# Altium PCB PCB1.PcbDoc
Units mil, origin at the board's own origin, x right, y up, seen from the top; angles counter-clockwise.
Board outline 1650 x 1605 mil, 2 copper layers (Top Layer, Bottom Layer); 17 components, 8 nets, 50 pads, 67 vias.
Unrouted connection lines stored in the file: 1.
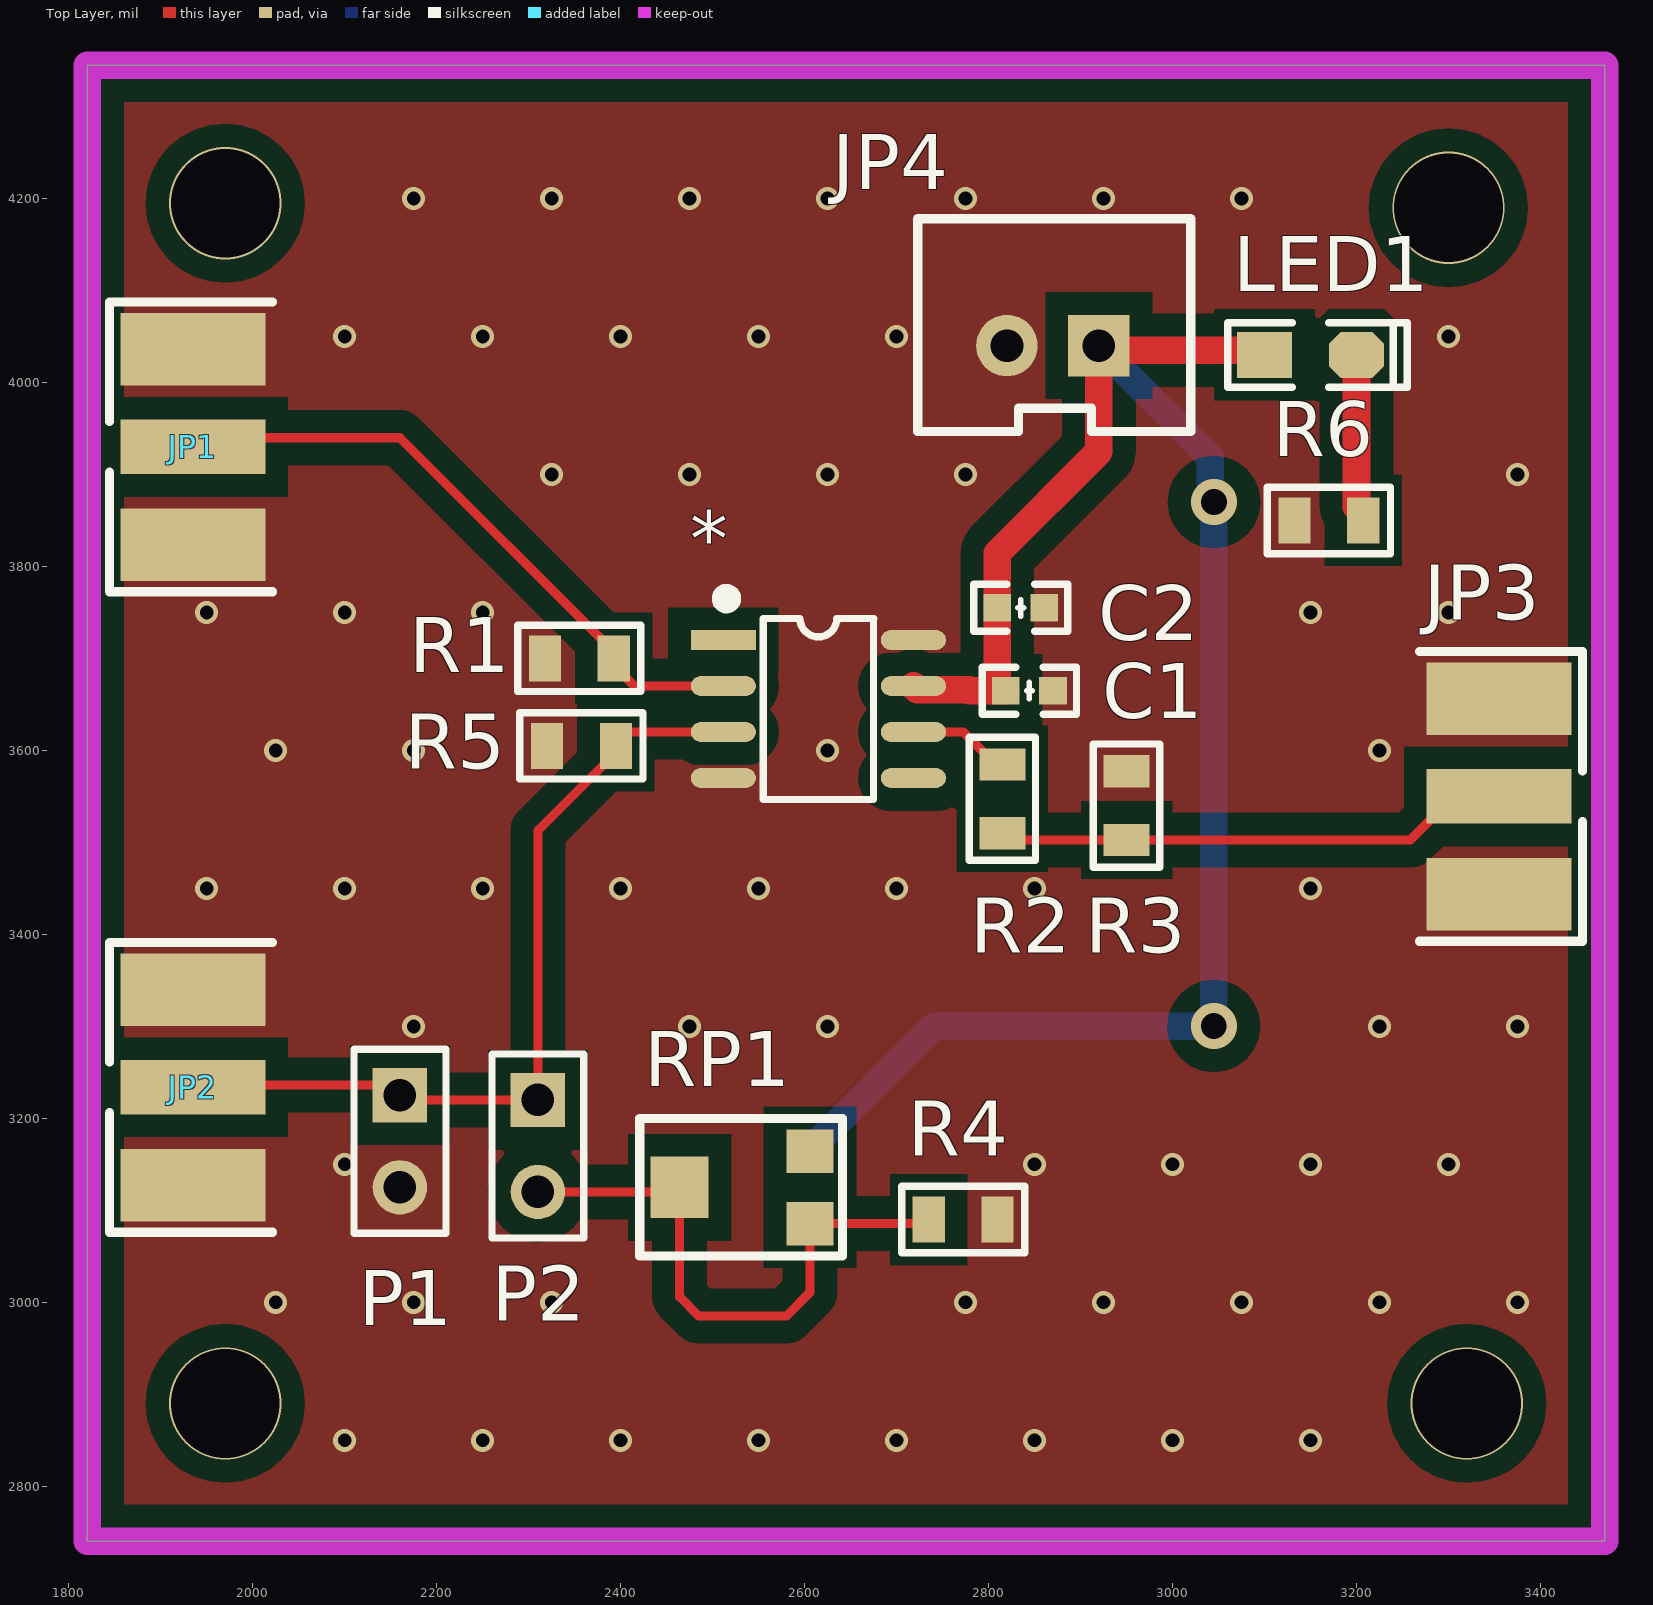
[diagram p0: Top Layer view]
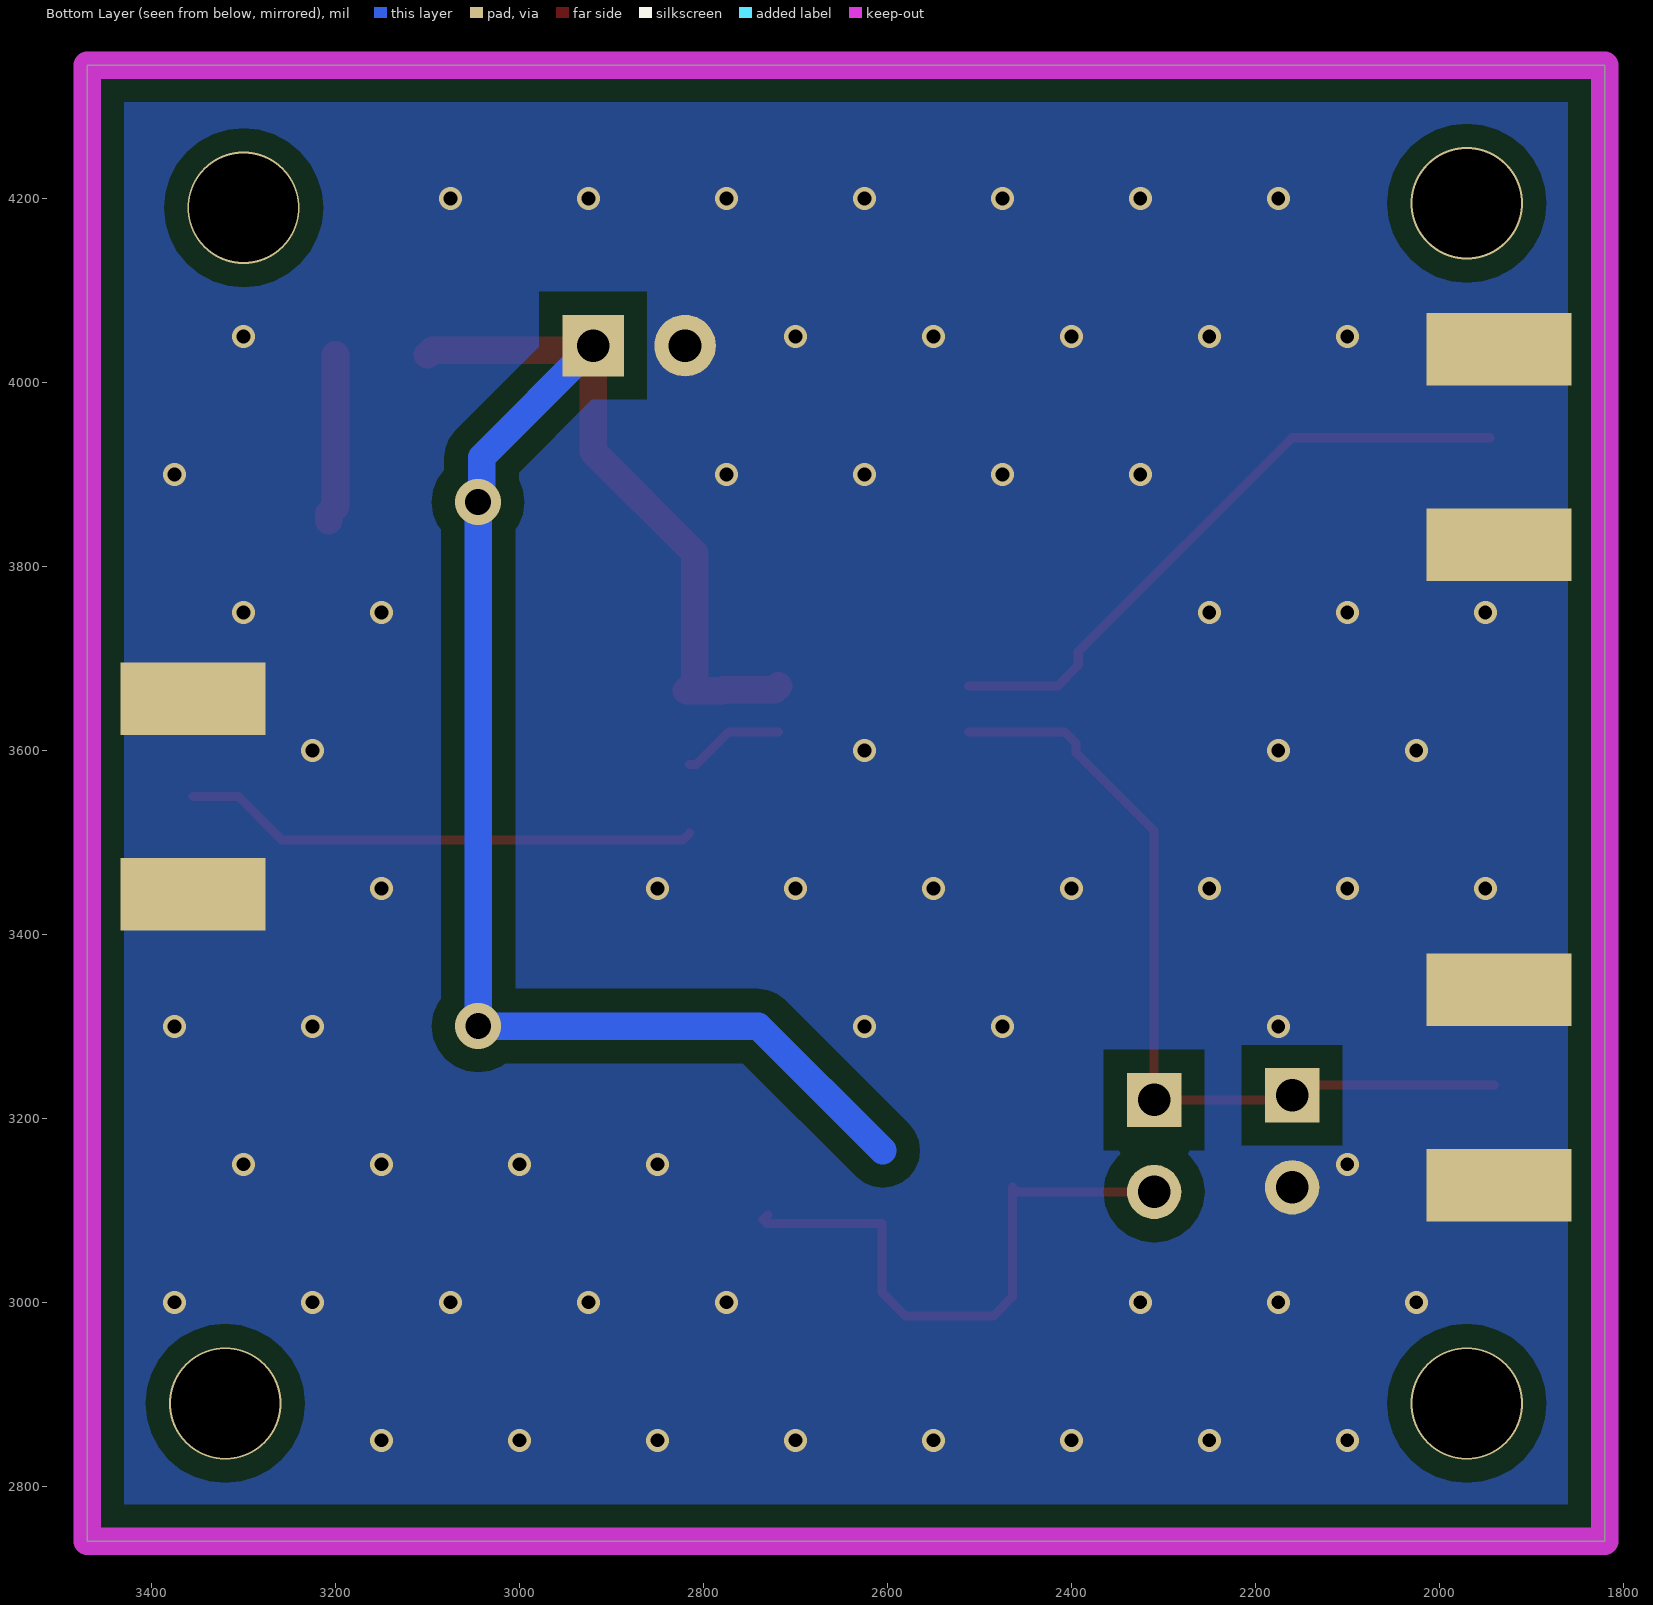
[diagram p1: Bottom Layer view, seen from below]
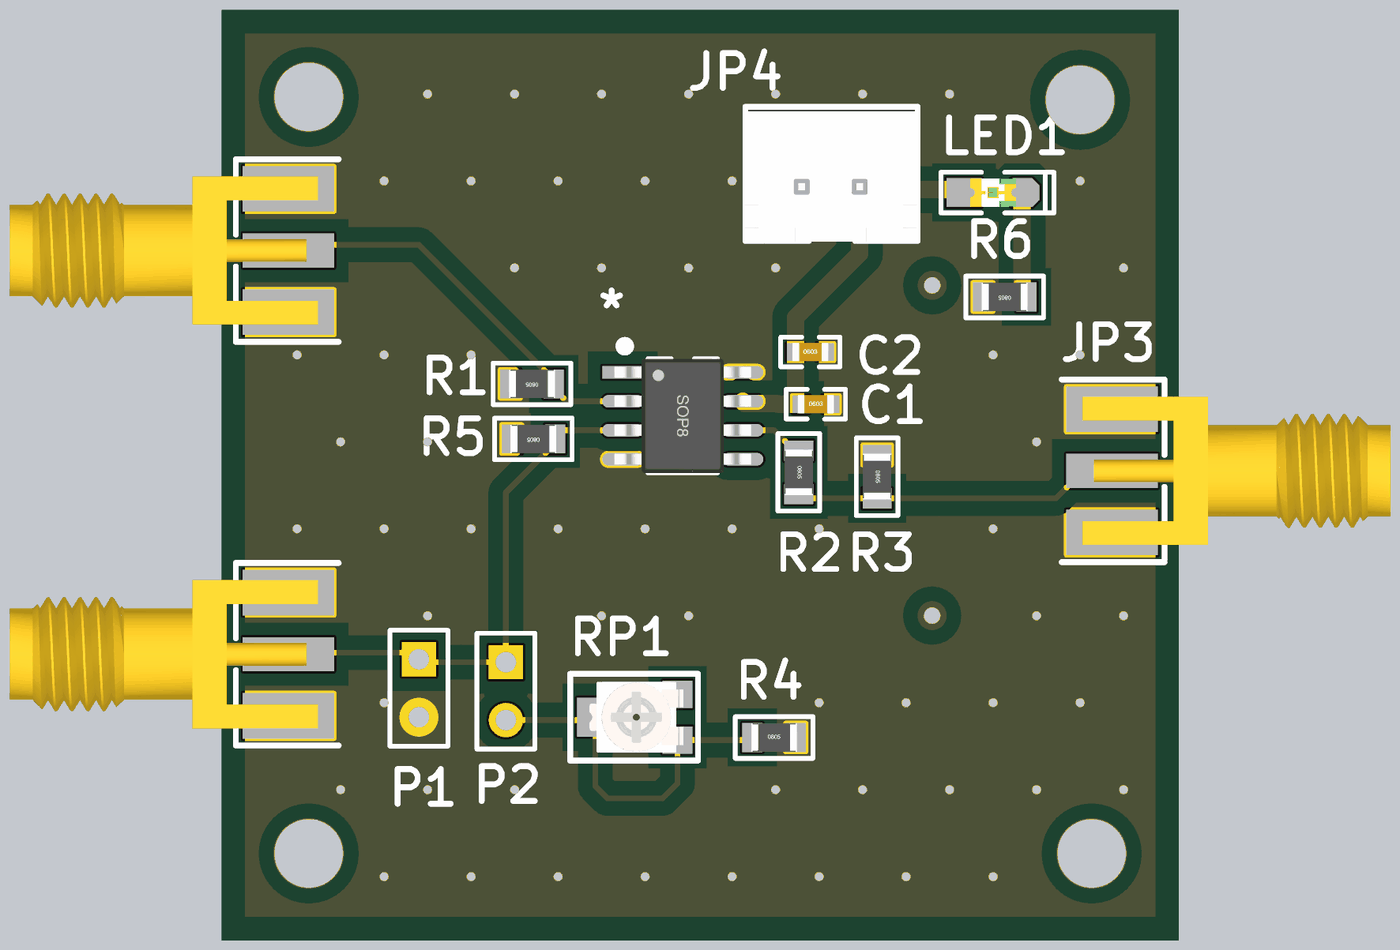
[diagram p2: 3D render of the assembled board from above, using the file's embedded part models]

## Layer stack, top to bottom
Top Solder: solder mask 0.4, Solder Resist, Dk 3.5
Top Layer: signal copper 1.4
Dielectric 1: dielectric 12.6, FR-4, Dk 4.8
Bottom Layer: signal copper 1.4
Bottom Solder: solder mask 0.4, Solder Resist, Dk 3.5

## Board outline
1820,2740 3470,2740 3470,4345 1820,4345

## Design rules (kind name [scope] priority, off if disabled: settings)
Clearance [All] p1: gap=10 ignorepadtopadclearanceinfootprint=FALSE except(0: Arc-Hole Track-Hole SMDPad-Hole THPad-Hole Via-Hole Fill-Hole Poly-Hole Region-Hole Text-Hole; 25: Arc-Fill Arc-Poly Arc-Region Track-Fill Track-Poly Track-Region SMDPad-Fill SMDPad-Poly SMDPad-Region THPad-Fill THPad-Poly THPad-Region Via-Fill Via-Poly Via-Region Fill-Fill Fill-Poly Fill-Region Poly-Poly Poly-Region Region-Region)
PolygonConnect [All] p1: connectstyle=Direct reliefconductorwidth=10 reliefentries=4 polygonreliefangle="90 Angle" airgapwidth=10
RoutingVias [All] p1: holewidth=118.11 width=196.85 viastyle="Through Hole" minholewidth=118.11 minwidth=196.85 maxholewidth=118.11 maxwidth=196.85
SolderMaskExpansion [All] p1: expansion=4 istentingtop=FALSE
Width [All] p1: maxlimit=30 minlimit=10 preferedwidth=30 minimp=50.000000 maximp=50.000000 favimp=50.000000
30 further rules are at their usual default settings.

## Components (designator, comment, footprint, x,y, rotation, side; value= is the part's Value field where it differs from the comment)
* "Component_1" SOP8_N 2615,3645 r0 top
C1 "0.1uf" "C 0603_L" 2844.41,3665 r0 top
C2 "0.1uf" "C 0603_L" 2835,3755 r0 top
JP1 "SMA WIFI 天线接口" SMA-KE 1935,3930 r90 top
JP2 "SMA WIFI 天线接口" SMA-KE 1935,3233.7 r90 top
JP3 "SMA WIFI 天线接口" SMA-KE 3355,3550 r270 top
JP4 "HDR-1X2" XH2.54-LI-2P 2870,4040 r180 top
LED1 "红色" "LED 0805R" 3150,4030 r0 top
P1 "Header 2" HDR1X2 2160,3225 r270 top
P2 "Header 2" HDR1X2 2310,3220 r270 top
R1 "10K" "R 0805_L" 2355,3700 r180 top
R2 "10K" "R 0805_L" 2815,3547.4 r270 top
R3 "10K" "R 0805_L" 2950,3540 r270 top
R4 "10K" "R 0805_L" 2772.4,3090 r0 top
R5 "10K" "R 0805_L" 2357.4,3605 r180 top
R6 "10K" "R 0805_L" 3170,3850 r180 top
RP1 "10K" 3303W 2535,3125 r90 top

## Footprints (in the part's own frame and the unit in brackets; to place one, negate y for a bottom-side part, rotate by r counter-clockwise, add the part's x,y. Pads: shape width x height; smd on the part's side, far side on the other; paste and mask are expansions set on the pad)
3303W [mm] "3.5*3.1*1.5mm                          淘宝ID:黄晶宝石"
  rect 1.2x1.3 smd: 1(-1,-1.8) 3(1,-1.8)
  rect 1.7x1.6 smd: 2(0,1.8)
  silkscreen extent -1.9,-2.7 1.9,2.9, body extent -1.55,-2.06 1.55,2.05, height 1.45
"C 0603_L" [mil] "无极性贴片电容                                       淘宝ID:黄晶宝石"
  rect 30x30 smd: 1(-25.59,0) 2(25.59,0)
  silkscreen extent -51,-26 51,26, body extent -31,-16 31,16, height 32
HDR1X2 [mm] "Connector; Header; 2 Position"
  rect 1.5x1.5 hole 0.9: 1(0,0)
  round 1.5 hole 0.9: 2(2.54,0)
  silkscreen extent -1.27,-1.27 3.81,1.27
"LED 0805R" [mil] "红色0805LED                                       淘宝ID:黄晶宝石"
  rect 60x50 smd: 1(-50,0)
  oct 60x50 smd: 2(50,0)
  silkscreen extent -90,-35 105,35, body extent -39,-25 39,25, height 32
"R 0805_L" [mil] "1/8W贴片电阻"
  rect 35x50 smd: 1(-37.4,0) 2(37.4,0)
  silkscreen extent -67,-36 67,36, body extent -39,-25 39,25, height 20
SMA-KE [mm] "SMA 偏脚射频天线座     淘宝ID:黄晶宝石"
  rect 1.5x4 smd: 1(0,0)
  rect 2x4 smd: 2(-2.7,0) 2(2.7,0)
  rect 2x4 smd far side: 3(-2.7,0) 3(2.7,0)
  silkscreen extent -4,-2.2 4,2.3, body extent -3.25,-1.3 3.25,12.2, height 3.75
SOP8_N [mm] "5*6*1.8mm（长宽高）封装库来自淘宝卖家 ID：黄晶宝石"
  rect 1.8x0.55 smd: 1(-2.625,1.905)
  oval 1.8x0.55 smd: 2(-2.625,0.635) 3(-2.625,-0.635) 4(-2.625,-1.905) 5(2.625,-1.905) 6(2.625,-0.635) 7(2.625,0.635) 8(2.625,1.905)
  silkscreen extent -2.69,-2.5 1.52,3.2, body extent -3,-2.5 3,2.5, height 1.9
XH2.54-LI-2P [mm] "接插件，2P  淘宝ID:黄晶宝石   店铺网址:https://shop463601444.taobao.com"
  rect 1.7x1.7 hole 0.9: 1(-1.27,0)
  round 1.7 hole 0.9: 2(1.27,0)
  silkscreen extent -3.81,-3.51 3.74,2.37, body extent -3.77,-3.3 3.77,2.4, height 7.05

## Part data
C1 C2: library part C, "贴片电容", BOM名称=无极性贴片电容, 唯一出售店铺网址=https://shop463601444.taobao.com, 淘宝ID="封装库来自淘宝 ID：黄晶宝石", 联系售后，技术支持=https://shop463601444.taobao.com
JP1 JP2 JP3: library part SMA, "SMA-2.4G射频天线接口", BOM名称=SMA-2.4G射频天线接口, 唯一出售店铺网址=https://shop463601444.taobao.com, 版权归属="封装库来自淘宝 ID：黄晶宝石"
JP4: library part "Header 2", "2P接插件", BOM名称=2P接插件
LED1: library part LED-SMD, "贴片LED", BOM名称=贴片LED, 学习资源=www.ooocke.com, 版权归属=源创客
P1 P2: "Header, 2-Pin", LatestRevisionDate=17-Jul-2002, LatestRevisionNote="Re-released for DXP Platform.", Publisher="Altium Limited"
R1 R2 R3 R4 R5 R6: library part R, "贴片电阻", BOM名称=贴片电阻, 封装库来自淘宝卖家 ID：黄晶宝石=其他店铺购入均为盗版，不享受售后技术支持服务，请立即申请退款, 版权归属="来自淘宝 ID：黄晶宝石", 联系售后=https://shop463601444.taobao.com
RP1: library part RP-ID, "插件单联电位器", BOM名称=插件电位器

## Via types
v1: diameter 25, hole 15, Top Layer to Bottom Layer, tented both sides, 61 vias
v2: diameter 122.05, hole 118.11, Top Layer to Bottom Layer, tented both sides, 4 vias
v3: diameter 50, hole 28, Top Layer to Bottom Layer, tented both sides, 2 vias

## Nets (pads, with @x,y where several pads share a name; then routed paths per layer and width w, separated by ;. In a path a pad name is that pad's centre, name@x,y a point inside that pad or via, vN(x,y) a via of type N, cw(c..) or ccw(c..) an arc to the next point about the centre after c; other vN are vias at no path point)
+5V: *.7 C1.1 C2.1 JP4.1 LED1.1 RP1.3 | length 1998.8
  Top Layer w30: *.7 2722.52,3665.83 2778.78,3665.83 2779.61,3665 C1.1 2809.41,3674.41 C2.1 2809.41,3814.41 2920,3925 JP4.1 2925,4035 3095,4035 LED1.1
  Bottom Layer w30: 2605,3165 2740.28,3300.28 v3(3044.87,3300.28) v3(3044.87,3300.28) 3044.94,3869.94 v3(3045,3870) 3041.17,3873.83 3041.17,3918.83 JP4.1
+IN: *.3 JP2.1 P1.1 P2.1 R5.1 | length 921.4
  Top Layer w10: JP2.1@1940,3236.3 2148.7,3236.3 P1.1 2165,3220 P2.1 2310,3512.7 2394.8,3597.5 R5.1 2394.8,3607.5 2407.3,3620 *.3
-IN: *.2 JP1.1 R1.1 | length 687.3
  Top Layer w10: JP1.1@1945,3940 2159.91,3940 2392.4,3707.5 R1.1 2392.4,3692.5 2414.91,3670 *.2
GND: *.4 *.8 C1.2 C2.2 JP1.2 JP1.3 JP2.2 JP2.3 JP3.2 JP3.3 JP4.2 P1.2 R1.2 R3.1 R4.2 R5.2 R6.2
  other v1: 2100,2850 2250,2850 2400,2850 2550,2850 2700,2850 2850,2850 3000,2850 3150,2850 2025,3000 2175,3000 2325,3000 2775,3000 2925,3000 3075,3000 3225,3000 3375,3000 2100,3150 2850,3150 3000,3150 3150,3150 3300,3150 2175,3300 2475,3300 2625,3300 3225,3300 3375,3300 1950,3450 2100,3450 2250,3450 2400,3450 2550,3450 2700,3450 2850,3450 3150,3450 2025,3600 2175,3600 2625,3600 3225,3600 1950,3750 2100,3750 2250,3750 3150,3750 3300,3750 2325,3900 2475,3900 2625,3900 2775,3900 3375,3900 2100,4050 2250,4050 2400,4050 2550,4050 2700,4050 3300,4050 2175,4200 2325,4200 2475,4200 2625,4200 2775,4200 2925,4200 3075,4200
Net*_6: *.6 R2.1 | length 111.2
  Top Layer w10: *.6 2772.3,3620 2807.5,3584.8 R2.1
NetLED1_2: LED1.2 R6.1 | length 183.1
  Top Layer w30: LED1.2 3200,3864.91 3207.4,3857.5 R6.1
OUTPUT: JP3.1 R2.2 R3.2 | length 562.7
  Top Layer w10: R2.2 2822.4,3502.6 R3.2 3258.39,3502.6 3305.79,3550 JP3.1
V: P2.2 R4.1 RP1.1 RP1.2 | length 649.2
  Top Layer w10: P2.2 2459.13,3120 RP1.2 2464.13,3005.87 2485,2985 2580,2985 2605.87,3010.87 RP1.1 2730.63,3085.63 R4.1 R4.1@2730,3095
pads on no net: *.1 *.5
copper on no net:
  other v2: 1970,2890 3320,2890 3300,4190 1970,4195

## Polygon pours and split planes (outlines as drawn)
GND on Top Layer "Top Layer-No Net" (solid, pour order 2): 1820,2740 3470,2740 3470,4345 1820,4345
GND on Bottom Layer "Top Layer-No Net1" (solid, pour order 3): 1820,2740 3470,2740 3470,4345 1820,4345

## Keep-outs
Keep-Out Layer:
  the board outline again, w30